# Altium PCB main_board.PcbDoc (part 1 of 3)
Units mil, origin at the board's own origin, x right, y up, seen from the top; angles counter-clockwise.
Board outline 11417.32 x 7421.26 mil, 2 copper layers (Top Layer, Bottom Layer); 177 components, 88 nets, 592 pads, 139 vias.
Unrouted connection lines stored in the file: 154.
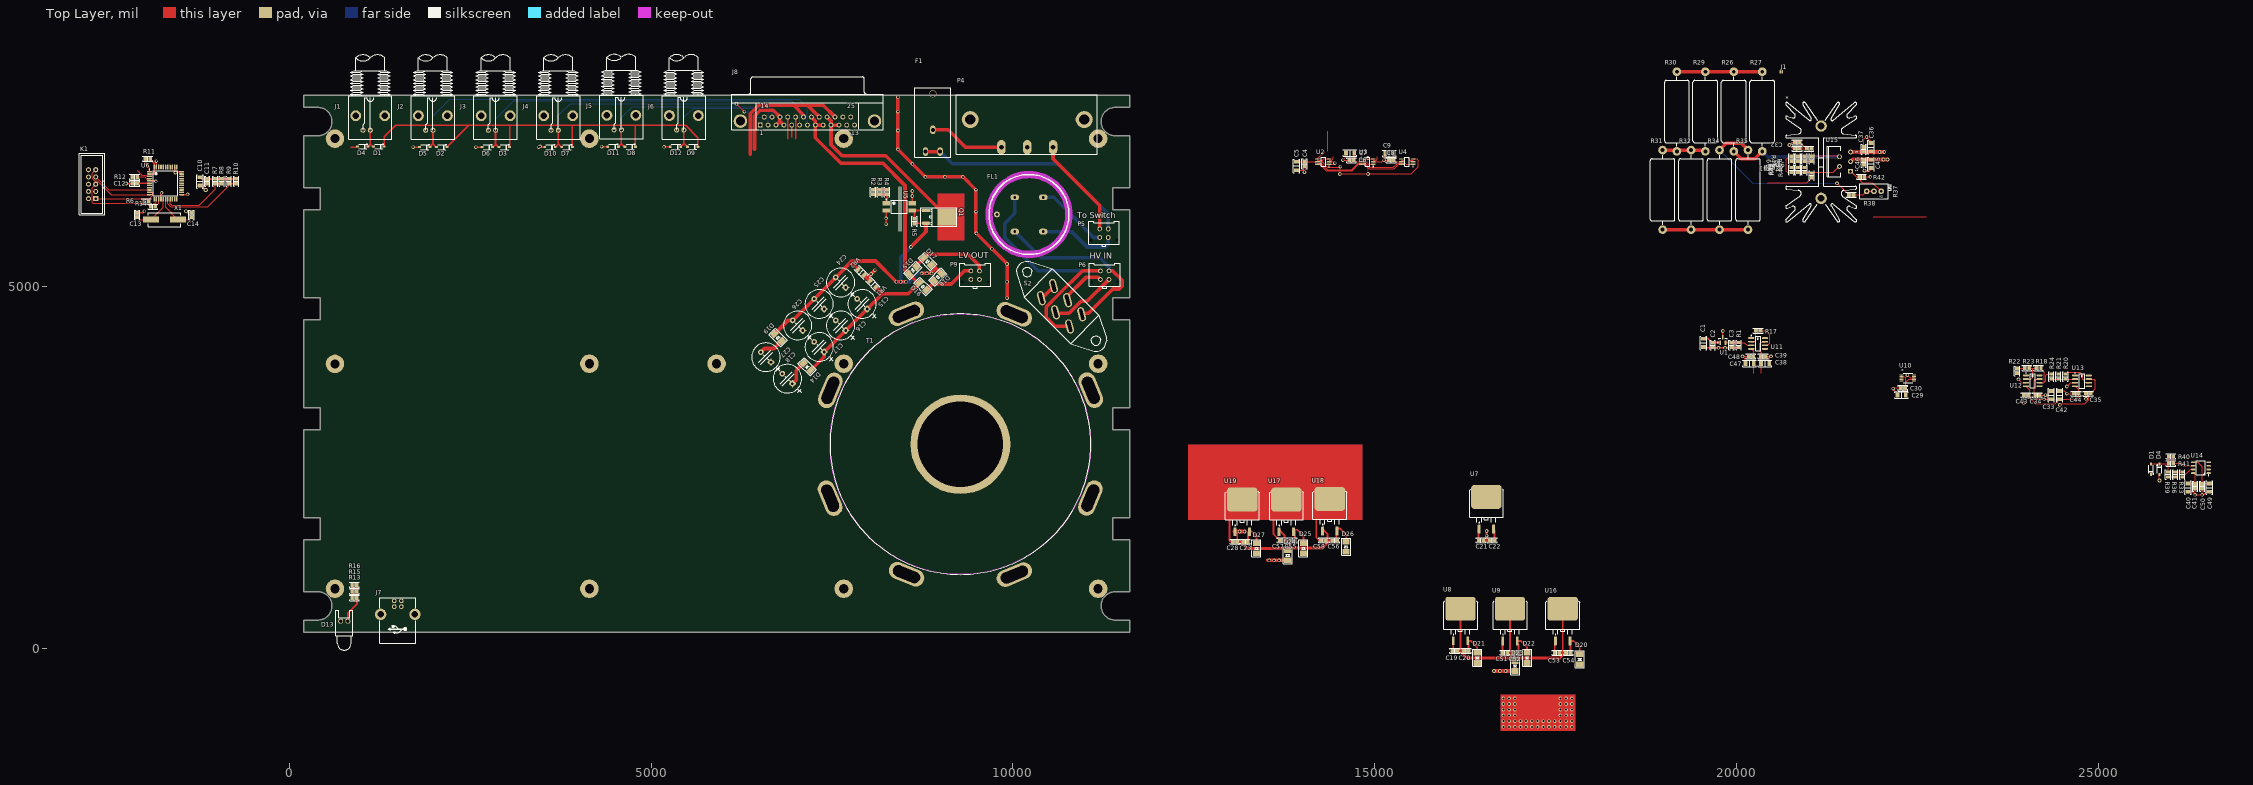
[diagram p0: Top Layer view]
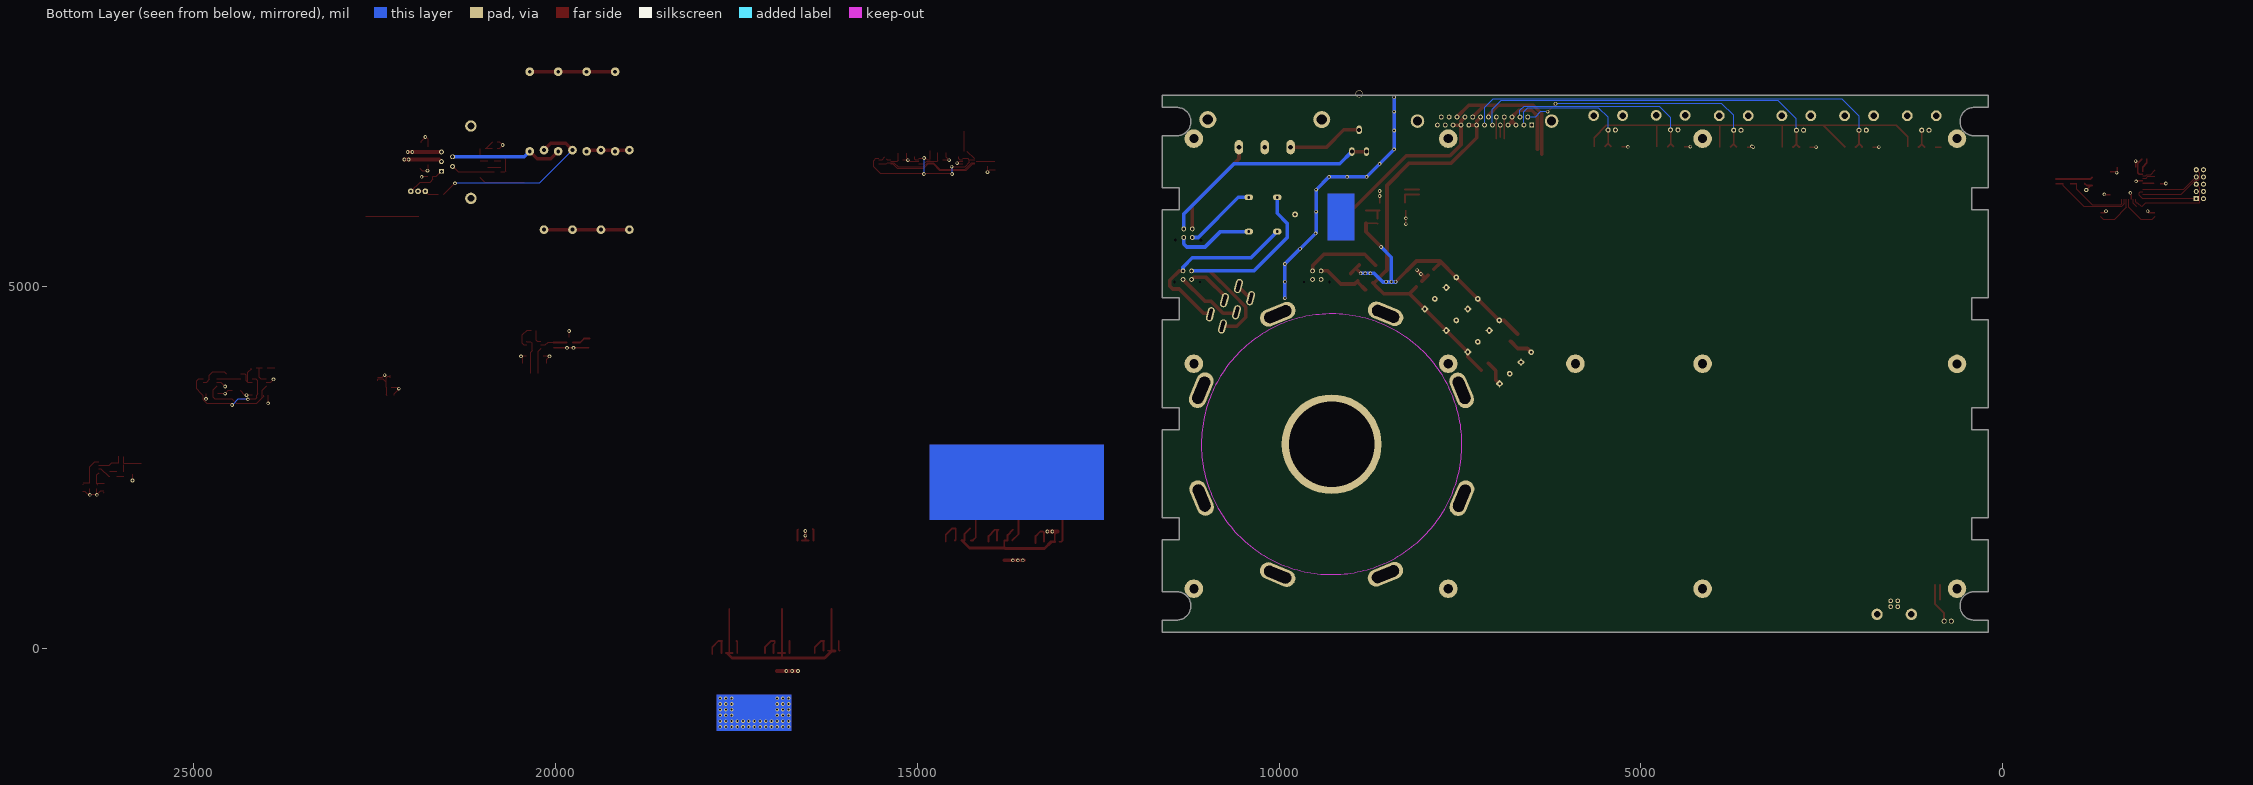
[diagram p1: Bottom Layer view, seen from below]

## Layer stack, top to bottom
Top Solder: solder mask 0.4, Solder Resist, Dk 3.5
Top Layer: signal copper 1.4
Dielectric 1: dielectric 12.6, FR-4, Dk 4.8
Bottom Layer: signal copper 1.4
Bottom Solder: solder mask 0.4, Solder Resist, Dk 3.5

## Board outline
196.85,787.4 196.85,1505.48 429.99,1505.48 429.99,1809.49 196.85,1809.49 196.85,3025.16 429.99,3025.16 429.99,3329.17 196.85,3329.17 196.85,4544.85 429.99,4544.85 429.99,4848.86 196.85,4848.86 196.85,6064.53 429.99,6064.53 429.99,6368.54 196.85,6368.54 196.85,7086.61 393.7,7086.61 ccw(c393.7,7283.46) 393.7,7480.31 196.85,7480.31 196.85,7647.64 11614.17,7647.64 11614.17,7480.31 11417.32,7480.31 ccw(c11417.32,7283.46) 11417.32,7086.61 11614.17,7086.61 11614.17,6368.54 11381.03,6368.54 11381.03,6064.53 11614.17,6064.53 11614.17,4848.86 11381.03,4848.86 11381.03,4544.85 11614.17,4544.85 11614.17,3329.17 11381.03,3329.17 11381.03,3025.16 11614.17,3025.16 11614.17,1809.49 11381.03,1809.49 11381.03,1505.48 11614.17,1505.48 11614.17,787.4 11417.32,787.4 ccw(c11417.32,590.55) 11417.32,393.7 11614.17,393.7 11614.17,226.38 196.85,226.38 196.85,393.7 393.7,393.7 ccw(c393.7,590.55) 393.7,787.4

## Design rules (kind name [scope] priority, off if disabled: settings)
Clearance [All] p1: gap=6 ignorepadtopadclearanceinfootprint=FALSE except(0: Arc-Hole Track-Hole SMDPad-Hole THPad-Hole Via-Hole Fill-Hole Poly-Hole Region-Hole Text-Hole)
DiffPairsRouting [All] p1: maxlimit=10 minlimit=10 mostfreqgap=10 toplayer_minwidth=15 toplayer_maxwidth=15 toplayer_prefwidth=15 bottomlayer_minwidth=15 bottomlayer_maxwidth=15 bottomlayer_prefwidth=15 maxuncoupledlength=500
FanoutControl Fanout_LCC [All] p1 off: bgadir=Out bgaviamode=Centered fanoutstyle=Auto fanoutdirection=Alternating viagrid=1 // Protel DXP Scope 1 Expression Was: IsLCC   Fanout_LCC (Default Rule)
FanoutControl Fanout_BGA [All] p2 off: bgadir=Out bgaviamode=Centered fanoutstyle=Auto fanoutdirection=Alternating viagrid=1 // Protel DXP Scope 1 Expression Was: IsBGA   Fanout_BGA (Default Rule)
FanoutControl Fanout_SOIC [All] p3 off: bgadir=Out bgaviamode=Centered fanoutstyle=Auto fanoutdirection=Alternating viagrid=1 // Protel DXP Scope 1 Expression Was: IsSOIC   Fanout_SOIC (Default Rule)
FanoutControl Fanout_Default [All] p4: bgadir=Out bgaviamode=Centered fanoutstyle=Auto fanoutdirection=Alternating viagrid=1 // Fanout_Default (Default Rule)
FanoutControl Fanout_Small [All] p5 off: bgadir=Out bgaviamode=Centered fanoutstyle=Auto fanoutdirection=Alternating viagrid=1 // Protel DXP Scope 1 Expression Was: (CompPinCount < 5)   Fanout_Small (Default Rule)
Height [All] p1: minheight=0 maxheight=2755.91 prefheight=500
PolygonConnect [All] p1: connectstyle=Relief reliefconductorwidth=10 reliefentries=4 polygonreliefangle="90 Angle" airgapwidth=10
RoomDefinition mcu [InComponentClass('mcu')] p1: confinementstyle=ConfineIn formatcopy=TRUE lockcomponents=FALSE outline -18820.26,-10826.6 -16820.26,-10826.6 -16820.26,-9826.6 -18820.26,-9826.6
RoomDefinition cc_gen_and_heat_pwr [InComponentClass('cc_gen_and_heat_pwr')] p2: confinementstyle=ConfineIn formatcopy=TRUE lockcomponents=FALSE outline -18820.26,-10826.6 -16820.26,-10826.6 -16820.26,-9826.6 -18820.26,-9826.6
RoomDefinition bncs [InComponentClass('bncs')] p3: confinementstyle=ConfineIn formatcopy=TRUE lockcomponents=FALSE outline -18820.26,-10826.6 -16820.26,-10826.6 -16820.26,-9826.6 -18820.26,-9826.6
RoomDefinition power_supply [InComponentClass('power_supply')] p4: confinementstyle=ConfineIn formatcopy=TRUE lockcomponents=FALSE outline -18820.26,-10826.6 -16820.26,-10826.6 -16820.26,-9826.6 -18820.26,-9826.6
RoutingVias [All] p1: holewidth=28 width=50 viastyle="Through Hole" minholewidth=28 minwidth=50 maxholewidth=28 maxwidth=50
SilkToSolderMaskClearance [All] p1 off: minsilkscreentomaskgap=10 clearancetoexposedcopper=TRUE // Protel DXP Scope 1 Expression Was: IsPad
SolderMaskExpansion [All] p1: expansion=4
Width [All] p1: maxlimit=50 minlimit=6 preferedwidth=25
22 further rules are at their usual default settings.

## Classes and differential pairs
component class power_supply: C15 C16 C17 C18 C19 C20 C21 C22 C23 C24 C25 C26 C27 C28 C51 C52 C53 C54 C55 C56 C57 C58 D14 D15 D16 D17 D18 D19 D20 D21 D22 D23 D24 D25 D26 D27 F1 FL1 P3 P4 P5 P6 P7 P8 P9 S1 S2 T1 U7 U8 U9 U16 U17 U18 U19 VR1 VR2
component class mcu: C4 C5 C6 C7 C8 C9 C10 C11 C12 C13 C14 D13 J7 J8 K1 Q1 R2 R3 R4 R5 R6 R7 R8 R9 R10 R11 R12 R13 R14 R15 R16 U2 U3 U4 U5 U6 X1
component class bncs: D1 D2 D3 D4 D5 D6 D7 D8 D9 D10 D11 D12 J1 J2 J3 J4 J5 J6
component class cc_gen_and_heat_pwr: * C1 C2 C3 C29 C30 C31 C32 C33 C34 C35 C36 C37 C38 C39 C40 C41 C42 C43 C44 C45 C46 C47 C48 C49 C50 D1 D4 J1 R1 R6 R17 R18 R19 R20 R21 R22 R23 R24 R25 R26 R27 R28 R29 R30 R31 R32 R33 R34 R35 R36 R37 R38 R39 R40 R41 R42 R43 R44 R45 R46 R47 R48 R? U1 U10 U11 U12 U13 U14 U15
differential pair D: +D_P -D_N
differential pair XTAL: +XTAL_P -XTAL_N
differential pair USBD: +USBD_P -USBD_N

## Components (designator, comment, footprint, x,y, rotation, side; value= is the part's Value field where it differs from the comment)
* "SK129-63STS" SK129-63STS 21170,6720 r90 top
C1 "" "CAP 1206/3216" 19542.19,4224.94 r270 top
C2 "" "CAP 0805/2012" 19672.19,4194.94 r270 top
C3 "" "CAP 0805/2012" 19932.19,4194.94 r270 top
C4 "" "CAP 0805/2012" 14030,6700 r270 top
C5 "" "CAP 1206/3216" 13920,6670 r270 top
C6 "" "CAP 0805/2012" 14680,6750 r180 top
C7 "" "CAP 1206/3216" 14660,6850 r180 top
C8 "" "CAP 0805/2012" 15230,6750 r180 top
C9 "" "CAP 1206/3216" 15205,6845 r180 top
C10 "" "CAP 1206/3216" -1234.71,6457.85 r270 top
C11 "" "CAP 0805/2012" -1134.71,6457.85 r270 top
C12 "" "CAP 0805/2012" -2134.71,6427.85 r0 top
C13 "" "CAP 0805/2012" -2101.52,5994.58 r90 top
C14 "" "CAP 0805/2012" -1351.52,5994.58 r90 top
C15 "" CAPE5.0mm 7916.98,4763.02 r135 top
C16 "" CAPE5.0mm 7620,4466.03 r135 top
C17 "" CAPE5.0mm 7323.02,4169.05 r135 top
C18 "" CAPE5.0mm 6884.61,3730.64 r135 top
C19 "" "CAP 0805/2012" 16105.91,-30.71 r0 top
C20 "" "CAP 0805/2012" 16265.91,-30.71 r180 top
C21 "" "CAP 0805/2012" 16468.5,1496.06 r0 top
C22 "" "CAP 0805/2012" 16625.98,1496.06 r180 top
C23 "" "CAP 0805/2012" 13216.54,1476.38 r0 top
C24 "" CAPE5.0mm 7620,5060 r135 top
C25 "" CAPE5.0mm 7323.02,4763.02 r135 top
C26 "" CAPE5.0mm 7026.03,4466.03 r135 top
C27 "" CAPE5.0mm 6587.62,4027.62 r135 top
C28 "" "CAP 0805/2012" 13070.87,1476.38 r180 top
C29 "Cap2" "CAP 1206/3216" 22283.46,3503.94 r180 top value=10uF
C30 "Cap2" "CAP 0805/2012" 22303.15,3602.36 r180 top value=100nF
C31 "" "CAP 0805/2012" 20840,7000 r180 top
C32 "" "CAP 0805/2012" 20840,6910 r180 top
C33 "Cap2" "CAP 1206/3216" 24350.39,3503.94 r90 top value=10uF
C34 "Cap2" "CAP 0805/2012" 24161.42,3503.94 r0 top value=100nF
C35 "Cap2" "CAP 0805/2012" 24862.2,3523.62 r180 top value=100nF
C36 "Cap2" "CAP 1206/3216" 21860,6930 r90 top value=10uF
C37 "Cap2" "CAP 0805/2012" 21760,6900 r90 top value=100nF
C38 "Cap2" "CAP 1206/3216" 20396.61,3941.26 r0 top value=10uF
C39 "Cap2" "CAP 0805/2012" 20371.02,4039.68 r0 top value=100nF
C40 "Cap2" "CAP 1206/3216" 26240.16,2224.41 r270 top value=10uF
C41 "Cap2" "CAP 0805/2012" 26338.58,2244.09 r270 top value=100nF
C42 "Cap2" "CAP 1206/3216" 24468.5,3503.94 r270 top value=10uF
C43 "Cap2" "CAP 0805/2012" 24003.94,3503.94 r0 top value=100nF
C44 "Cap2" "CAP 0805/2012" 24696.85,3523.62 r0 top value=100nF
C45 "Cap2" "CAP 1206/3216" 21860,6700 r90 top value=10uF
C46 "Cap2" "CAP 0805/2012" 21760,6720 r90 top value=100nF
C47 "Cap2" "CAP 1206/3216" 20182.05,3941.26 r0 top value=10uF
C48 "Cap2" "CAP 0805/2012" 20201.73,4039.68 r0 top value=100nF
C49 "Cap2" "CAP 1206/3216" 26535.43,2224.41 r90 top value=10uF
C50 "Cap2" "CAP 0805/2012" 26437.01,2244.09 r90 top value=100nF
C51 "" "CAP 0805/2012" 16799.21,-59.06 r0 top
C52 "" "CAP 0805/2012" 16956.69,-59.06 r180 top
C53 "" "CAP 0805/2012" 17519.69,-59.06 r0 top
C54 "" "CAP 0805/2012" 17677.17,-59.06 r180 top
C55 "" "CAP 0805/2012" 13866.14,1496.06 r0 top
C56 "" "CAP 0805/2012" 14448.82,1496.06 r0 top
C57 "" "CAP 0805/2012" 13720.47,1496.06 r180 top
C58 "" "CAP 0805/2012" 14291.34,1496.06 r180 top
D1 "" SOD123 1238.27,6938.82 r180 top
D1 "" SOD123 25728.35,2480.31 r90 top
D2 "" SOD123 2106.93,6931.02 r180 top
D3 "" SOD123 2973.07,6931.02 r180 top
D4 "" SOD123 1015.83,6938.82 r180 top
D4 "" SOD123 25846.46,2480.31 r270 top
D5 "" SOD123 1870.71,6931.02 r180 top
D6 "" SOD123 2736.85,6931.02 r180 top
D7 "" SOD123 3839.21,6931.02 r180 top
D8 "" SOD123 4711.26,6936.93 r180 top
D9 "" SOD123 5574.65,6934.17 r180 top
D10 "" SOD123 3602.99,6931.02 r180 top
D11 "" SOD123 4475.04,6936.93 r180 top
D12 "" SOD123 5338.42,6934.17 r180 top
D13 "" LED-0 760,380 r0 top
D14 "" DIODE-SMA 7231.09,3822.56 r315 top
D15 "" DIODE-SMA 8689.33,5300.33 r45 top
D16 "" DIODE-SMA 8830.75,4932.63 r315 top
D17 "" DIODE-SMA 8894.39,5279.12 r315 top
D18 "" DIODE-SMA 9035.81,5208.41 r45 top
D19 "" DIODE-SMA 6828.04,4225.61 r315 top
D20 "" DIODE-SMA 17834.65,-44.29 r90 top
D21 "" DIODE-SMA 16417.32,-24.61 r90 top
D22 "" DIODE-SMA 17106.3,-24.61 r90 top
D23 "" DIODE-SMA 16940,-135.55 r90 top
D24 "" DIODE-SMA 13799.21,1186.02 r270 top
D25 "" DIODE-SMA 14015.75,1282.48 r270 top
D26 "" DIODE-SMA 14606.3,1304.13 r270 top
D27 "" DIODE-SMA 13366.14,1282.48 r270 top
F1 "" FPG5-3101-0050 8675,6800 r0 top
FL1 "" FM412-2 10225,6000 r180 top
J1 "2 way net tie junction" 2way_LP 20620,7970 r180 top net-tie
J1 "" BNC-RA 1319.53,7364.09 r0 top
J2 "" BNC-RA 2185.67,7364.09 r0 top
J3 "" BNC-RA 3051.81,7364.09 r0 top
J4 "" BNC-RA 3917.95,7364.09 r0 top
J5 "" BNC-RA 4790,7370 r0 top
J6 "" BNC-RA 5653.39,7367.24 r0 top
J7 "" USB_TypeB 1500,620 r180 top
J8 "" DB25 6509.21,7234.72 r0 top
K1 "" IDC10-B -2674.71,6217.85 r90 top
P4 "" GSP1-8101-1 9842.52,6929.13 r0 top
P5 "" MOLEX-430450412 11200,5800 r180 top
P6 "" MOLEX-430450412 11210,5220 r180 top
P9 "" MOLEX-430450412 9420,5220 r180 top
Q1 "IRF640" DPAK-GDS 8799.88,6055 r0 top
R1 "" "RES 0805/2012" 20032.19,4194.94 r270 top
R2 "" "RES 0805/2012" 8066.48,6310.55 r90 top
R3 "" "RES 0805/2012" 8159.88,6310.81 r90 top
R4 "" "RES 0805/2012" 8259.88,6310.81 r90 top
R5 "" "RES 0805/2012" 8639.88,5905 r90 top
R6 "" "RES 0805/2012" -1974.45,6180 r180 top
R7 "" "RES 0805/2012" -1024.71,6457.85 r90 top
R8 "" "RES 0805/2012" -934.71,6457.85 r90 top
R9 "" "RES 0805/2012" -834.71,6457.85 r90 top
R10 "" "RES 0805/2012" -734.71,6457.85 r90 top
R11 "" "RES 0805/2012" -1954.71,6767.85 r0 top
R12 "" "RES 0805/2012" -2134.71,6517.85 r180 top
R13 "" "RES 0805/2012" 900,700 r180 top
R14 "Res1" "RES 0805/2012" -1884.71,6107.85 r0 top
R15 "" "RES 0805/2012" 900,790 r180 top
R16 "" "RES 0805/2012" 900,880 r180 top
R17 "" "RES 0805/2012" 20300.16,4394.02 r180 top
R18 "" "RES 0805/2012" 24173.23,3877.95 r180 top
R19 "" "RES 0805/2012" 21040,6770 r270 top
R20 "" "RES 0805/2012" 24547.24,3759.84 r270 top
R21 "" "RES 0805/2012" 24448.82,3759.84 r90 top
R22 "" "RES 0805/2012" 23877.95,3838.58 r270 top
R23 "" "RES 0805/2012" 24015.75,3877.95 r180 top
R24 "" "RES 0805/2012" 24350.39,3759.84 r90 top
R25 "" "RES 0805/2012" 21040,6540 r90 top
R26 "" RESTH_AXIAL_MRA-10 19963.15,7422.68 r270 top
R27 "" RESTH_AXIAL_MRA-10 20356.85,7422.68 r270 top
R28 "" "RES 0805/2012" 21004.45,6910 r0 top
R29 "" RESTH_AXIAL_MRA-10 19569.45,7422.68 r90 top
R30 "" RESTH_AXIAL_MRA-10 19175.75,7422.68 r90 top
R31 "" RESTH_AXIAL_MRA-10 18978.9,6340 r90 top
R32 "" RESTH_AXIAL_MRA-10 19372.6,6340 r90 top
R33 "" "RES 0805/2012" 26161.42,2406.5 r270 top
R34 "" RESTH_AXIAL_MRA-10 19766.3,6340 r270 top
R35 "" RESTH_AXIAL_MRA-10 20160,6340 r270 top
R36 "" "RES 0805/2012" 26062.99,2406.5 r90 top
R37 "Multiturn" trimmer-multiturn 22000,6320 r180 top
R38 "" "RES 0805/2012" 21585.55,6270 r0 top
R39 "" "RES 0805/2012" 25964.57,2406.5 r270 top
R40 "" "RES 0805/2012" 26003.94,2657.48 r0 top
R41 "" "RES 0805/2012" 26003.94,2559.06 r0 top
R42 "" "RES 0805/2012" 21730,6520 r0 top
R43 "" "RES 0805/2012" 20940,6614.45 r270 top
R44 "" "RES 0805/2012" 20850,6614.45 r270 top
R45 "" "RES 0805/2012" 20760,6614.45 r270 top
R46 "" "RES 0805/2012" 20760,6770 r90 top
R47 "" "RES 0805/2012" 20850,6770 r90 top
R48 "" "RES 0805/2012" 20940,6770 r90 top
S2 "" T22205B 10393.7,4842.52 r315 top
T1 "toroidal_transformer" MCTA060 9275,2825 r22.5 top
U1 "" TI-DBZ3_N 19812.19,4264.94 r90 top
U2 "" TI-DGS10_N 14290,6730 r180 top
U3 "" TI-DGS10_N 14900,6730 r180 top
U4 "" TI-DGS10_N 15450,6730 r180 top
U5 "LTV-817" gullwing-opto-4 8429.88,6105 r0 top
U6 "" 44ML_N -1709.71,6432.85 r0 top
U7 "" D2PAK-3 16544.21,1874.72 r270 top
U8 "" D2PAK-3 16185.91,329.29 r270 top
U9 "" D2PAK-3 16870.08,328.68 r270 top
U10 "" 21-0061L 22368.96,3740.16 r0 top value=Value
U11 "" TI-D8_N 20300.16,4216.85 r0 top
U12 "" TI-D8_N 24094.49,3700.79 r0 top
U13 "" TI-D8_N 24775,3700 r0 top
U14 "" SOIC8-AD8220 26524.8,2426.18 r0 top
U15 "" TO-220-5 21500.08,6730.08 r90 top
U16 "" D2PAK-3 17598.43,328.68 r270 top
U17 "" D2PAK-3 13780,1837.5 r270 top
U18 "" D2PAK-3 14380,1847.5 r270 top
U19 "" D2PAK-3 13170,1837.5 r270 top
VR1 "" "CAP 1206/3216 - 1.8MM" 8065.48,5038.79 r135 top
VR2 "" "CAP 1206/3216 - 1.8MM" 7902.84,5201.42 r135 top
X1 "" "ABRACON ABLS" -1724.71,5927.85 r0 top

## Footprints (in the part's own frame and the unit in brackets; to place one, negate y for a bottom-side part, rotate by r counter-clockwise, add the part's x,y. Pads: shape width x height; smd on the part's side, far side on the other; paste and mask are expansions set on the pad)
2way_LP [mil] "2 way low power net tie junction"
  rrect5% 20x50 smd paste-100: 1(-14,0) 2(14,0)
21-0061L [mil]
  rect 56x11 smd: 1(-85.5,39.37) 2(-85.5,19.68) 3(-85.5,0) 4(-85.5,-19.68) 5(-85.5,-39.37) 6(85.5,-39.37) 7(85.5,-19.68) 8(85.5,0) 9(85.5,19.68) 10(85.5,39.37)
  silkscreen extent -65,-65 65,65
44ML_N [mm] "Thin QFP, 44-Leads, Body 10x10mm, Pitch 0.8mm, IPC Medium Density"
  oval 1.75x0.55 smd: 1(-5.65,4) 2(-5.65,3.2) 3(-5.65,2.4) 4(-5.65,1.6) 5(-5.65,0.8) 6(-5.65,0) 7(-5.65,-0.8) 8(-5.65,-1.6) 9(-5.65,-2.4) 10(-5.65,-3.2) 11(-5.65,-4) 23(5.65,-4) 24(5.65,-3.2) 25(5.65,-2.4) 26(5.65,-1.6) 27(5.65,-0.8) 28(5.65,0) 29(5.65,0.8) 30(5.65,1.6) 31(5.65,2.4) 32(5.65,3.2) 33(5.65,4)
  oval 0.55x1.75 smd: 12(-4,-5.65) 13(-3.2,-5.65) 14(-2.4,-5.65) 15(-1.6,-5.65) 16(-0.8,-5.65) 17(0,-5.65) 18(0.8,-5.65) 19(1.6,-5.65) 20(2.4,-5.65) 21(3.2,-5.65) 22(4,-5.65) 34(4,5.65) 35(3.2,5.65) 36(2.4,5.65) 37(1.6,5.65) 38(0.8,5.65) 39(0,5.65) 40(-0.8,5.65) 41(-1.6,5.65) 42(-2.4,5.65) 43(-3.2,5.65) 44(-4,5.65)
  silkscreen extent -5.77,-4.35 4.35,4.95, body extent -5,-5 5,5, height 1.2
"ABRACON ABLS" [mm] "Crystal, 2-Leads, Body 4.70x11.40mm, Pitch 8.80mm, IPC Medium Density"
  rect 5.6x2.1 smd: 1(-4.75,0) 2(4.75,0)
  silkscreen extent -5.78,-2.43 5.77,2.43, body extent -6.35,-2.35 6.35,2.35, height 4.2
BNC-RA [mil]
  round 70 hole 40: 1(-200,-200) 2(-300,-200)
  round 150 hole 90: A(0,0) B(-400,0)
  silkscreen extent -500,-325 100,842, body extent -490,-280 91,1127, height 619
"CAP 0805/2012" [mm] "Chip Capacitor, 2-Leads, Body 2.00x1.20mm, IPC Medium Density"
  rect 1.3x1.4 smd: 1(-0.8,0) 2(0.8,0)
  silkscreen extent -1.7,-0.9 1.7,0.9, body extent -1,-0.64 1,0.64, height 1.26
"CAP 1206/3216" [mm] "Chip Capacitor, 2-Leads, Body 3.25x1.60mm, IPC Medium Density"
  rect 1.3x1.8 smd: 1(-1.45,0) 2(1.45,0)
  silkscreen extent -2.37,-1.12 2.38,1.12, body extent -1.6,-0.81 1.6,0.81, height 1.62
"CAP 1206/3216 - 1.8MM" [mm] "Chip Capacitor, 2-Leads, Body 3.25x1.60mm, IPC Medium Density"
  rect 1.3x1.8 smd: 1(-1.45,0) 2(1.45,0)
  silkscreen extent -2.38,-1.13 2.38,1.13, body extent -1.6,-0.8 1.6,0.8, height 1.8
CAPE5.0mm [mm]
  rrect25% 2x2 hole 0.9: 1(-2.5,0)
  round 2 hole 0.9: 2(2.5,0)
  silkscreen extent -6.8,-5 5,5, body extent -4.96,-4.97 4.95,4.96, height 20
D2PAK-3 [mil] "D-PAK/TO-263-3; 3 Leads (1 Cropped); Body 14.7 (inc. leads) x 10.2 mm (LxW max)"
  round 20 on Mech15: 0(0,0)
  rrect25% 120x40 smd: 1(222.5,-100) 3(222.5,100)
  rrect25% 330x420 smd: 2(-222.5,0)
  silkscreen extent -335,-232 139,236, body extent -361,-197 256,197, height 189
DB25 [mm]
  rect 1.69x1.69 hole 1.09: 1(0,0)
  round 1.69 hole 1.09: 2(2.761,0) 3(5.522,0) 4(8.283,0) 5(11.044,0) 6(13.805,0) 7(16.566,0) 8(19.327,0) 9(22.088,0) 10(24.849,0) 11(27.61,0) 12(30.371,0) 13(33.132,0) 14(1.381,2.84) 15(4.142,2.84) 16(6.903,2.84) 17(9.664,2.84) 18(12.424,2.84) 19(15.185,2.84) 20(17.946,2.84) 21(20.707,2.84) 22(23.469,2.84) 23(26.23,2.84) 24(28.991,2.84) 25(31.752,2.84)
  round 4.76 hole 3.26: 26(-6.96,1.42) 27(40.092,1.42)
  silkscreen extent -9.93,-1.58 43.17,16.92, body extent -9.95,-1.55 43.15,16.95, height 12.6
DIODE-SMA [mm]
  rect 2x2.5 smd: A(-0.875,0) K(-4.425,0)
  silkscreen extent -5.65,-1.58 0.35,1.55, body extent -5.2,-1.3 0,1.3, height 2.4
DPAK-GDS [mm]
  rect 6.5x5.9 smd: D(7.275,-2.25)
  oval 3x1.2 smd: G(0,0) S(0,-4.5)
  silkscreen extent -1.78,-5.46 10.79,1.02, body extent -0.5,-5.48 9.44,1.06, height 2.41
FM412-2 [mil]
  oval 120x80 hole 39.37: 1(-195,-236.5) 2(199,-236.5) 4(199,236.5) 5(-194,236.5)
  round 80 hole 39.37: 3(445,-0.5)
  Top Layer keep-out circle w100: c2.43,-0.07 r551.18
  silkscreen extent -551,-552 554,553, body extent -549,-549 553,554, height 610
FPG5-3101-0050 [mm]
  oval 1.905x3.048 hole 1.397: 1(5.55,9.375) 2(3,1.75) 2(8.1,1.75)
  round 2.54 hole 2.159: 4(5.55,22.075)
  silkscreen extent -0.78,-0.18 11.85,24.15, body extent -0.68,0.02 11.82,32.02, height 12.75
GSP1-8101-1 [mm]
  oval 3x5 hole 1.65: 1(0,0) 2(9.05,0) 3(18.1,0)
  round 6 hole 3.6: NC(-10.95,9.7) NC(29.05,9.7)
  silkscreen extent -15.88,-2.54 33.66,18.41, body extent -15.79,-2.48 33.81,21.82, height 30.25
gullwing-opto-4 [mm] "SOP, 4-Leads, Body 4,60x6,50mm, Pitch 2,54mm, IPC Low Density"
  rect 2.6x1.45 smd: 1(-4.575,1.27) 2(-4.575,-1.27) 3(4.575,-1.27) 4(4.575,1.27)
  silkscreen extent -4.7,-2.3 2.88,2.67, body extent -5.15,-2.3 5.15,2.3, height 3.5
IDC10-B [mil]
  rect 70x70 hole 40: 1(0,0)
  round 70 hole 40: 2(0,100) 3(100,0) 4(100,100) 5(200,0) 6(200,100) 7(300,0) 8(300,100) 9(400,0) 10(400,100)
  silkscreen extent -225,-125 625,225, body extent -225,-125 625,225, height 358
LED-0 [mil] "LED; 2 Leads"
  round 70 hole 50: 1(50,0) 2(-50,0)
  silkscreen extent -120,-400 120,150
MCTA060 [mm]
  oval 6x13 hole 4 slot 10 at 90 deg: NC(-49.53,0) NC(49.53,0)
  oval 13x6 hole 4 slot 10 at 45 deg rot 45: NC(-34.925,34.925) NC(34.925,-34.925)
  oval 13x6 hole 4 slot 10 at 135 deg rot 135: NC(-34.925,-34.925) NC(34.925,34.925)
  oval 13x6 hole 4 slot 10 at 0 deg: NC(0,49.53) NC(0,-49.53)
  round 35 hole 30: NC(0,0)
  Keep-Out Layer region: 0,-45.72 -17.503,-42.244 -32.344,-32.335 -42.263,-17.501 -45.75,0 -45.75,0 -39.621,22.875 -22.875,39.62 0,45.75 0,45.75 17.501,42.263 32.335,32.344 42.244,17.503 45.72,0 45.72,0 42.24,-17.496 32.329,-32.329 17.496,-42.24 0,-45.72
  silkscreen extent -45.75,-45.75 45.75,45.75, body extent -45.75,-45.74 45.75,45.74, height 39.13
MOLEX-430450412 [mil]
  round 65 hole 39.37: 1(0,0) 2(-118,0) 3(0,118) 4(-118,118)
  round 0 hole 39.37 unplated: NC(-236,155)
  round 0 hole 42.91 unplated: NC(118,156)
  silkscreen extent -273,-108 154,240, body extent -259,-97 141,248, height 393
"RES 0805/2012" [mm] "Chip Resistor, 2-Leads, Body 2.00x1.25mm, IPC Medium Density"
  rect 1.15x1.35 smd: 1(-0.875,0) 2(0.875,0)
  silkscreen extent -1.7,-0.9 1.7,0.9, body extent -0.95,-0.62 1.05,0.63, height 0.6
RESTH_AXIAL_MRA-10 [mil] "MRA-10 Axial Resistor Thru-Hole; 2 Leads"
  round 50 on Mech15: 0(0,0)
  round 120 hole 54: 1(-550,0) 2(550,0)
  silkscreen extent -480,-170 480,170, body extent -567,-171 567,171, height 342
SK129-63STS [mm]
  round 4 hole 2.4: 1(-12.624,-0.013) 1(12.776,-0.013)
  silkscreen extent -20.93,-12.5 21.07,12.5, body extent -20.93,-12.43 21.07,12.57, height 63.7
SOD123 [mm] "SOD-123; 2 Leads; Body 2.7 x 1.6 mm, (LxW)"
  round 0.508 on Mech15: 0(0,0)
  rrect25% 1x0.8 smd: A(1.85,0) K(-1.85,0)
  silkscreen extent -1.75,-1 1.45,0.85, body extent -1.95,-0.9 1.95,0.9, height 1.18
SOIC8-AD8220 [mm]
  round 1 on Mech15: 0(-2.7,1.905)
  oval 1.6x0.6 smd: 1(0,0) 2(0,1.27) 3(0,2.54) 4(0,3.81) 5(-5.4,3.81) 6(-5.4,2.54) 7(-5.4,1.27) 8(-5.4,0)
  silkscreen extent -4.3,-0.92 0.12,4.4, body extent -5.7,-0.55 0.3,4.36, height 1.75
T22205B [mil]
  oval 200x98.43 hole 45 slot 157.48 at 150 deg rot 150: 1(551.44,237) 2(551.44,0) 3(276,237.39) 4(275.61,0) 5(0,237.39) 6(0,0)
  silkscreen extent -543,-157 1094,394, body extent -542,-157 1092,395, height 517
TI-D8_N [mm] "SOIC, 8-Leads, Body 4.9x3.9mm, Pitch 1.27mm, IPC Medium Density"
  oval 2.2x0.6 smd: 1(-2.4,1.905) 2(-2.4,0.635) 3(-2.4,-0.635) 4(-2.4,-1.905) 5(2.4,-1.905) 6(2.4,-0.635) 7(2.4,0.635) 8(2.4,1.905)
  silkscreen extent -2.52,-2.5 0.9,2.88, body extent -2,-2.5 2,2.5, height 1.75
TI-DBZ3_N [mm] "SOT23, 3-Leads, Body 2.92x1.3 mm, Pitch 0.95 mm, IPC Medium Density"
  rect 1.6x0.6 smd: 1(-0.9,0.95) 2(-0.9,-0.95) 3(0.9,0)
  silkscreen extent -1.02,-1.5 0.7,1.92, body extent -0.7,-1.52 0.7,1.52, height 1.12
TI-DGS10_N [mm] "SOP, 10-Leads, Body 3x3mm, Pitch 0.5mm, IPC Medium Density"
  oval 1.7x0.3 smd: 1(-2.05,1) 2(-2.05,0.5) 3(-2.05,0) 4(-2.05,-0.5) 5(-2.05,-1) 6(2.05,-1) 7(2.05,-0.5) 8(2.05,0) 9(2.05,0.5) 10(2.05,1)
  silkscreen extent -2.18,-1.55 0.8,1.82, body extent -1.55,-1.55 1.55,1.55, height 1.1
TO-220-5 [mm] "TO, Thru-Hole, Vertical, Heatsink Mounted; 5 Bent Staggered Leads; Pitch 1.7mm"
  round 0.5 on Mech15: 0(0,0)
  rrect25% 1.7x1.7 hole 1.092: 1(-3.4,-1.96)
  round 1.7 hole 1.092: 2(-1.7,1.96) 3(0,-1.96) 4(1.7,1.96) 5(3.4,-1.96)
  silkscreen extent -5.35,1.51 5.35,6.21, body extent -5.08,-2.16 5.08,6.08, height 20.99
trimmer-multiturn [mil]
  round 80 hole 38: 1(0,0) 2(200,0) 3(100,0)
  silkscreen extent -140,-104 295,104, body extent -140,-98 289,98, height 394
USB_TypeB [mil]
  round 64 hole 36 mask+1: 1(-49.21,-39.16) 2(49.21,-39.16) 3(49.21,39.58) 4(-49.21,39.58)
  round 157.48 hole 90.55 mask+0: 4(-237.01,146.28) 4(237.01,146.28)
  silkscreen extent -250,-85 250,545, body extent -283,-67 283,551, height 453

## Part data
C1 C5 C7 C9 C10: library part Cap2, "Capacitor", Capacitance=10µF, Capacitor kind=MLCC, Capacitor type=ceramic, Case - inch=1206, Case - mm=3216, Dielectric=X5R, Manufacturer=SAMSUNG, Manufacturer Part Number=CL31A106KAHNNNE, Operating temperature=-55...85°C, Operating voltage=25V, Tolerance=±10%, Category="1206 MLCC SMD Capacitors", ComponentLink1Description=http://static.tme.eu/products_pics/b/e/9/be9e0dd298dcf4979ea1dd3d226e0bfa/58780.jpg, ComponentLink1URL=http://static.tme.eu/products_pics/b/e/9/be9e0dd298dcf4979ea1dd3d226e0bfa/58780.jpg, MinAmount=100, Mounting=SMD, Multiples=100, PackageDescription=1206, PackageReference=CAPR5-4X5, Price Type=NET, Pricing 1="100=0.0248, 300=0.0203, 1000=0.0167, 2000=0.0131, 10000=0.0127 (EUR)", Published=23-Sep-2002, Publisher="Altium Limited", Stock 1=279700, SuppliedAmount=0, Supplier 1=TME, Supplier Part Number 1=CL31A106KAHNNNE, Unit=pcs, Weight=0.061
C2 C12 C19 C20 C21 C22 C23 C28 C51 C52 C53 C54 C55 C56 C57 C58: library part Cap2, "Capacitor", Capacitance=1µF, Capacitor kind=MLCC, Capacitor type=ceramic, Case - inch=0805, Case - mm=2012, Dielectric=X7R, Manufacturer=SAMSUNG, Manufacturer Part Number=CL21B105KAFNNNE, Operating temperature=-55...125°C, Operating voltage=25V, Tolerance=±10%, Category="0805 MLCC SMD Capacitors", ComponentLink1Description=http://static.tme.eu/products_pics/d/b/b/dbbd93eaf25225110ca26eb66da77328/58538.jpg, ComponentLink1URL=http://static.tme.eu/products_pics/d/b/b/dbbd93eaf25225110ca26eb66da77328/58538.jpg, MinAmount=100, Mounting=SMD, Multiples=100, PackageDescription="Capacitor; 2 Leads", PackageReference=CAPR5-4X5, Price Type=NET, Pricing 1="100=0.0108, 300=0.00924, 1000=0.00748, 2000=0.006, 6000=0.0058 (EUR)", Published=23-Sep-2002, Publisher="Altium Limited", Stock 1=56790, SuppliedAmount=0, Supplier 1=TME, Supplier Part Number 1=CL21B105KAFNNNE, Unit=pcs, Weight=0.039
C3 C4 C6 C8 C11 C31 C32: library part Cap2, "Capacitor", Capacitance=100nF, Capacitor kind=MLCC, Capacitor type=ceramic, Case - inch=0805, Case - mm=2012, Dielectric=X7R, Manufacturer=YAGEO, Manufacturer Part Number=CC0805JRX7R9BB104, Operating voltage=50V, Supplier Part Number 1=CC0805JRX7R9104, Tolerance=±5%, Category="0805 MLCC SMD Capacitors", ComponentLink1Description=http://static.tme.eu/products_pics/d/b/b/dbbd93eaf25225110ca26eb66da77328/58538.jpg, ComponentLink1URL=http://static.tme.eu/products_pics/d/b/b/dbbd93eaf25225110ca26eb66da77328/58538.jpg, MinAmount=100, Mounting=SMD, Multiples=100, Price Type=NET, Pricing 1="100=0.00613, 300=0.00464, 1000=0.00342, 4000=0.00284, 20000=0.00273 (EUR)", Stock 1=89911, SuppliedAmount=0, Supplier 1=TME, Unit=pcs, Weight=0.042
C13 C14: library part Cap2, "Capacitor", Capacitance=22pF, Capacitor kind=MLCC, Capacitor type=ceramic, Case - inch=0805, Case - mm=2012, Dielectric=C0G, Manufacturer=SAMSUNG, Manufacturer Part Number=CL21C220JBANNNC, Operating temperature=-55...125°C, Operating voltage=50V, Tolerance=±5%, Category="0805 MLCC SMD Capacitors", ComponentLink1Description=http://static.tme.eu/products_pics/d/b/b/dbbd93eaf25225110ca26eb66da77328/58538.jpg, ComponentLink1URL=http://static.tme.eu/products_pics/d/b/b/dbbd93eaf25225110ca26eb66da77328/58538.jpg, MinAmount=100, Mounting=SMD, Multiples=100, PackageDescription="Capacitor; 2 Leads", PackageReference=CAPR5-4X5, Price Type=NET, Pricing 1="100=0.00603, 300=0.00435, 1000=0.00317, 4000=0.00171, 12000=0.00163 (EUR)", Published=23-Sep-2002, Publisher="Altium Limited", Stock 1=298580, SuppliedAmount=0, Supplier 1=TME, Supplier Part Number 1=CL21C220JBANNNC, Unit=pcs, Weight=0.032
C15 C16 C17 C18 C24 C25 C26 C27: library part "Cap Pol1", "capacitor , electrolytic", Capacitance=1000µF, Capacitor type=electrolytic, Manufacturer=NICHICON, Manufacturer Part Number=UVZ1V102MHD, Operating current max.=810mA, Operating temperature=-55...105°C, Operating voltage="35V DC", Tolerance=±20%, Body dimensions="Ø12.5 x 20mm", Category="105°C THT Electrolytic Capacitors", ComponentLink1Description=http://static.tme.eu/products_pics/c/5/f/c5fef3dcb868d5f42dbf93bcba194bc3/52948.jpg, ComponentLink1URL=http://static.tme.eu/products_pics/c/5/f/c5fef3dcb868d5f42dbf93bcba194bc3/52948.jpg, ComponentLink2Description=http://static.tme.eu/products_pics/9/d/3/9d3c8a28bff4572cbe0221dcc6b489cc/52582.jpg, ComponentLink2URL=http://static.tme.eu/products_pics/9/d/3/9d3c8a28bff4572cbe0221dcc6b489cc/52582.jpg, LatestRevisionDate=17-Jul-2002, LatestRevisionNote="Re-released for DXP Platform.", MinAmount=5, Mounting=THT, Multiples=1, PackageDescription=10pitch, PackageReference=RB7.6-15, Price Type=NET, Pricing 1="5=0.33643, 25=0.28487, 100=0.21269, 400=0.19593 (EUR)", Pricing 2="25=0.24372, 100=0.18546, 400=0.1709, 1600=0.15536 (EUR)", Published=8-Jun-2000, Publisher="Altium Limited", Service life=1000h, Stock 1=0, Stock 2=838, SuppliedAmount=0, Supplier 1=TME, Supplier 2=TME, Supplier Part Number 1=UVZ1V102MHD, Supplier Part Number 2=UVR1V102MHD, Terminal pitch=5mm, Unit=pcs, Weight=3.7
C29 C33 C36 C38 C40 C42 C45 C47 C49: "Capacitor", Capacitance=10µF, Capacitor kind=MLCC, Capacitor type=ceramic, Case - inch=1206, Case - mm=3216, Dielectric=X5R, Manufacturer=SAMSUNG, Manufacturer Part Number=CL31A106KAHNNNE, Operating temperature=-55...85°C, Operating voltage=25V, Tolerance=±10%, Category="1206 MLCC SMD Capacitors", ComponentLink1Description=http://static.tme.eu/products_pics/b/e/9/be9e0dd298dcf4979ea1dd3d226e0bfa/58780.jpg, ComponentLink1URL=http://static.tme.eu/products_pics/b/e/9/be9e0dd298dcf4979ea1dd3d226e0bfa/58780.jpg, MinAmount=100, Mounting=SMD, Multiples=100, PackageDescription=1206, PackageReference=CAPR5-4X5, Price Type=NET, Pricing 1="100=0.0248, 300=0.0203, 1000=0.0167, 2000=0.0131, 10000=0.0127 (EUR)", Published=23-Sep-2002, Publisher="Altium Limited", Stock 1=279700, SuppliedAmount=0, Supplier 1=TME, Supplier Part Number 1=CL31A106KAHNNNE, Unit=pcs, Weight=0.061
C30 C34 C35 C37 C39 C41 C43 C44 C46 C48 C50: "Capacitor", Capacitance=100nF, Capacitor kind=MLCC, Capacitor type=ceramic, Case - inch=0805, Case - mm=2012, Dielectric=X7R, Manufacturer=SAMSUNG, Manufacturer Part Number=CL21B104KBFNNNG, Operating temperature=-55...125°C, Operating voltage=50V, Tolerance=±10%, Category="0805 MLCC SMD Capacitors", ComponentLink1Description=http://static.tme.eu/products_pics/d/b/b/dbbd93eaf25225110ca26eb66da77328/58538.jpg, ComponentLink1URL=http://static.tme.eu/products_pics/d/b/b/dbbd93eaf25225110ca26eb66da77328/58538.jpg, MinAmount=1000, Mounting=SMD, Multiples=1000, PackageDescription="Capacitor; 2 Leads", PackageReference=CAPR5-4X5, Price Type=NET, Pricing 1="1000=0.00335, 3000=0.00288, 12000=0.0028 (EUR)", Published=23-Sep-2002, Publisher="Altium Limited", Stock 1=0, SuppliedAmount=0, Supplier 1=TME, Supplier Part Number 1=CL21B104KBFNNNG, Unit=pcs, Weight=0.038
D1 D1 D2 D3 D4 D4 D5 D6 D7 D8 D9 D10 D11 D12: library part "D Schottky", "Schottky Diode", Case=SOD123, Forward voltage at If=390mV, Load current=500mA, Manufacturer="FAIRCHILD SEMICONDUCTOR", Manufacturer Part Number=MBR0520L, Off state voltage max.=20V, Category="SMD Schottky Diodes", Code_JEDEC=DO-214-AA, ComponentLink1Description=http://static.tme.eu/products_pics/e/d/b/edbd030cb344fc64745afa0f91101952/285567.jpg, ComponentLink1URL=http://static.tme.eu/products_pics/e/d/b/edbd030cb344fc64745afa0f91101952/285567.jpg, Diode type="Schottky rectifying", LatestRevisionDate=17-Jul-2002, LatestRevisionNote="Re-released for DXP Platform.", MinAmount=10, Mounting=SMD, Multiples=1, PackageDescription="DO-214-AA/SMB; 2 C-Bend Leads; Body 5.3 x 3.6 mm, inc. leads (LxW)", PackageReference=SMB, Price Type=NET, Pricing 1="10=0.0403, 50=0.0376, 250=0.0333, 1000=0.03, 3000=0.0281 (EUR)", Published=8-Jun-2000, Publisher="Altium Limited", Stock 1=24595, SuppliedAmount=0, Supplier 1=TME, Supplier Part Number 1=MBR0520L, Unit=pcs, Weight=0.032
D13: library part LED0, "LED red 5mm", LED colour=red, LED current=20mA, Manufacturer="KINGBRIGHT ELECTRONIC", Manufacturer Part Number=L-1503CB/1ID, Operating voltage=2...2.5V, Category="LED Circuit Board Indicators", ComponentLink1Description=http://static.tme.eu/products_pics/2/d/8/2d8734f7e5dfd4453dcfb445f87d0bf6/363629.jpg, ComponentLink1URL=http://static.tme.eu/products_pics/2/d/8/2d8734f7e5dfd4453dcfb445f87d0bf6/363629.jpg, Diode type=LED, Front=convex, LED diameter=5mm, LED lens=diffused, LED version="in housing", Luminosity=8-30mcd, MinAmount=5, Mounting=THT, Multiples=1, Number of diodes=1, Price Type=NET, Pricing 1="5=0.1308, 10=0.11837, 25=0.10529, 100=0.09483, 500=0.08829 (EUR)", Stock 1=1055, SuppliedAmount=0, Supplier 1=TME, Supplier Part Number 1=L-1503CB/1ID, Unit=pcs, Viewing angle=60°, Wavelength=625nm, Weight=0.4
D14 D15 D16 D17 D18 D19 D20 D21 D22 D23 D24 D25 D26 D27: library part "Diode 1N4007", "Diode rectifier 1A", Case=DO214AC, Load current=1A, Manufacturer=VISHAY, Manufacturer Part Number=S1M-E3/5AT, Off state voltage max.=1kV, Category="SMD Universal Diodes", Code_JEDEC=DO-204-AL, ComponentLink3Description=http://static.tme.eu/products_pics/b/9/c/b9cb4d885950d1fd4db176504dcacd85/60379.jpg, ComponentLink3URL=http://static.tme.eu/products_pics/b/9/c/b9cb4d885950d1fd4db176504dcacd85/60379.jpg, DatasheetVersion=1998, Diode type=rectifying, LatestRevisionDate=17-Jul-2002, LatestRevisionNote="Re-released for DXP Platform.", MinAmount=25, Mounting=SMD, Multiples=1, Price Type=NET, Pricing 1="25=0.0319, 100=0.0285, 500=0.0252, 2500=0.0219, 7500=0.0204 (EUR)", Stock 1=1100, SuppliedAmount=0, Supplier 1=TME, Supplier Part Number 1=S1M-E3/5AT, Unit=pcs, Weight=0.126
F1: library part Res2, "fuse holder", Colour=black, Contact resistance=5mO, Flammability rating=UL94V-0, Manufacturer=SCHURTER, Manufacturer Part Number=3101.0050, Manufacturer series=FPG5, Maximum current=10A, Operating temperature=-40...85°C, Rated voltage="250V AC", Body material=thermoplastic, Category="Fuses - PCB Fuseholders", ComponentLink1Description=http://static.tme.eu/products_pics/c/7/b/c7be9a841de84195debe9c2bc5e13201/378039.jpg, ComponentLink1URL=http://static.tme.eu/products_pics/c/7/b/c7be9a841de84195debe9c2bc5e13201/378039.jpg, Contact material=copper, Contact plating=tinned, Fuse accessories type="fuse holder", Fuses application="tube fuses", Fuse size=5x20mm, MinAmount=1, Mounting=PCB, Mounting hole diameter=Ø12.5mm, Multiples=1, Price Type=NET, Pricing 1="1=1.3262, 5=1.2056, 20=1.0248, 50=0.9042, 100=0.7837 (EUR)", Stock 1=748, SuppliedAmount=0, Supplier 1=TME, Supplier Part Number 1=3101.0050, Unit=pcs, Weight=5.157
FL1: library part emi_filter, Capacitance Cx=100nF, Capacitance Cy=2.2nF, Inductance of individual winding=2mH, Manufacturer=FILTERCON, Manufacturer Part Number=FM414-2, Operating current max.=2A, Operating voltage="250V AC", Category="THT Suppression Filters", ComponentLink1Description=http://static.tme.eu/products_pics/2/9/f/29f0a38a703704a9c5886b8224f607ef/346186.jpg, ComponentLink1URL=http://static.tme.eu/products_pics/2/9/f/29f0a38a703704a9c5886b8224f607ef/346186.jpg, ComponentLink2Description=http://static.tme.eu/products_pics/f/8/b/f8b7aa3a0d349d9562b424160ad18612/6719.jpg, ComponentLink2URL=http://static.tme.eu/products_pics/f/8/b/f8b7aa3a0d349d9562b424160ad18612/6719.jpg, ComponentLink3Description=http://static.tme.eu/products_pics/3/4/2/3420617ffe855077c7443b070bb0da97/359972.jpg, ComponentLink3URL=http://static.tme.eu/products_pics/3/4/2/3420617ffe855077c7443b070bb0da97/359972.jpg, ComponentLink4Description=http://static.tme.eu/products_pics/8/c/6/8c6609017eb196817ebf7bb4af7e52b0/22859.jpg, ComponentLink4URL=http://static.tme.eu/products_pics/8/c/6/8c6609017eb196817ebf7bb4af7e52b0/22859.jpg, ComponentLink5Description=http://static.tme.eu/products_pics/3/1/9/3198dfd0aef271d22f7bcddd6f12f5cb/6717.jpg, ComponentLink5URL=http://static.tme.eu/products_pics/3/1/9/3198dfd0aef271d22f7bcddd6f12f5cb/6717.jpg, Enclosure material=metal, Filter type=anti-interference, MinAmount=1, Mounting=THT, Multiples=1, Price Type=NET, Pricing 1="1=2.68, 5=2.45, 10=2.02 (EUR)", Pricing 2="1=3.58, 5=3.13, 10=2.68 (EUR)", Pricing 3="1=2.45, 5=2.25, 10=1.89, 50=1.84, 200=1.81 (EUR)", Pricing 4="1=3.13, 5=2.9, 10=2.45 (EUR)", Pricing 5="1=3.58, 5=3.13, 10=2.68 (EUR)", Stock 1=0, Stock 2=25, Stock 3=14, Stock 4=1, Stock 5=0, SuppliedAmount=0, Supplier 1=TME, Supplier 2=TME, Supplier 3=TME, Supplier 4=TME, Supplier 5=TME, Supplier Part Number 1=FM414-2, Supplier Part Number 2=1FM415-0R, Supplier Part Number 3=FM415-0, Supplier Part Number 4=FM411-4, Supplier Part Number 5=1FM411-4R, Unit=pcs, Weight=12.938
J1: library part 2way, ComponentLink1Description=Source, ComponentLink1URL=http://www.edatools.cz/addons, FootprintNote="LP=12mil, MP=40mil, HP=120mil"
J1 J2 J3 J4 J5 J6: library part BNC-PCB-RA, "connector bnc", Manufacturer="TE CONNECTIVITY", Manufacturer Part Number=1-1337543-0, Category="BNC connectors", ComponentLink1Description=http://static.tme.eu/products_pics/6/3/2/63240353f8a8790dbe8f7bd93b014c1a/378606.jpg, ComponentLink1URL=http://static.tme.eu/products_pics/6/3/2/63240353f8a8790dbe8f7bd93b014c1a/378606.jpg, Connector=socket, Connector type=BNC, Connector variant=insulated, Contact plating="gold plated", Electrical mounting=THT, Insulator material=polyester, Mechanical mounting="on PCBs", MinAmount=1, Multiples=1, Price Type=NET, Pricing 1="1=1.22, 25=1.1, 100=0.98, 1000=0.86 (EUR)", Spatial orientation="angled 90°", Stock 1=44, SuppliedAmount=0, Supplier 1=TME, Supplier Part Number 1=1-1337543-0, Unit=pcs, Wave impedance=50O, Weight=13.22
J7: library part USB-B, "USB b device connector", Colour=white, Manufacturer=LUMBERG, Manufacturer Part Number="2411 02", Supplier Part Number 1=2411-02, Category="USB & IEEE1394 connectors", ComponentLink1Description=http://static.tme.eu/products_pics/d/8/1/d81dedeb5f01696a6050c2c1b3ea9f71/397242.jpg, ComponentLink1URL=http://static.tme.eu/products_pics/d/8/1/d81dedeb5f01696a6050c2c1b3ea9f71/397242.jpg, Connector=socket, Connector type="USB B", Electrical mounting=THT, Mechanical mounting="on PCBs", MinAmount=1, Multiples=1, Number of pins=4, Price Type=NET, Pricing 1="1=0.58, 10=0.52, 50=0.46, 100=0.4 (EUR)", Spatial orientation="angled 90°", Stock 1=1211, SuppliedAmount=0, Supplier 1=TME, Unit=pcs, Variant="USB 2.0", Weight=3.4
J8: library part "D Connector 25", "d-sub, 25 pins,  Right Angle", Manufacturer="ADAM TECH", Manufacturer Part Number=DB25-PL-24, Max. contact resistance=20mO, Operating temperature=-55...105°C, Rated current=5A, Category="D-Sub connectors", ComponentLink1Description=http://static.tme.eu/products_pics/a/a/0/aa0b2bedeb24536dd5398409c1e4fa96/378908.jpg, ComponentLink1URL=http://static.tme.eu/products_pics/a/a/0/aa0b2bedeb24536dd5398409c1e4fa96/378908.jpg, Connector=socket, Connector type=D-Sub, Connector variant="7,2mm standard", Electrical mounting=THT, Locking system=screws, MinAmount=1, Multiples=1, Number of pins=25, Price Type=NET, Pricing 1="1=1.2328, 25=1.1047, 100=0.9887, 500=0.8606 (EUR)", Spatial orientation="angled 90°", Stock 1=154, SuppliedAmount=0, Supplier 1=TME, Supplier Part Number 1=DB25-PL-24, Thread=UNC4-40, Unit=pcs, Weight=12.873
K1: library part IDC10, "header 10pin, boxed", Manufacturer=NINIGI, Manufacturer Part Number=ZL231-10PG, Category="IDC connectors", ComponentLink1Description=http://static.tme.eu/products_pics/2/9/e/29e35db67837c6e13659dd28b2765932/375255.jpg, ComponentLink1URL=http://static.tme.eu/products_pics/2/9/e/29e35db67837c6e13659dd28b2765932/375255.jpg, Connector=socket, Connector type=IDC, Contact plating="gold plated", Contacts pitch=2.54mm, Electrical mounting=THT, MinAmount=10, Multiples=10, Number of pins=10, Price Type=NET, Pricing 1="10=0.08292, 50=0.07256, 200=0.06219, 1000=0.05183, 5000=0.04147 (EUR)", Spatial orientation=straight, Stock 1=106380, SuppliedAmount=0, Supplier 1=TME, Supplier Part Number 1=ZL231-10PG, Type of pin configuration=2x5, Unit=pcs, Weight=1.433
P4: library part "Header 3", "IEC pcb AC power socket", Manufacturer=SCHURTER, Manufacturer Part Number=GSP1.8101.1, Operating temperature=-25...70°C, Rated current=10A, Rated voltage="250V AC", Category="AC power connectors", ComponentLink1Description=http://static.tme.eu/products_pics/f/d/c/fdcf8bc89f97dfd93b47315e6a3722d1/329145.jpg, ComponentLink1URL=http://static.tme.eu/products_pics/f/d/c/fdcf8bc89f97dfd93b47315e6a3722d1/329145.jpg, Connector=socket, Connector type="AC supply", Connector variant="C14 (E)", LatestRevisionDate=17-Jul-2002, LatestRevisionNote="Re-released for DXP Platform.", Leads="4.8x0.8mm connectors", Mechanical mounting="on PCBs", MinAmount=1, Mounting hole diameter="30.3 x 22.5mm", Mounting holes pitch=40mm, Multiples=1, Panel thickness="max 3mm", Price Type=NET, Pricing 1="1=0.97, 5=0.92, 10=0.87, 20=0.82, 100=0.72 (EUR)", Publisher="Altium Limited", Standard="IEC 60320", Stock 1=292, SuppliedAmount=0, Supplier 1=TME, Supplier Part Number 1=GSP1.8101.1, Thread=M3, Unit=pcs, Weight=13.947
P5 P6 P9: library part "Header 2X2", "Connector 4 wire pcb", Manufacturer=AMPHENOL, Manufacturer Part Number=MF30-SVE1-04, Max. contact resistance=10mO, Maximum current=5A, Rated voltage=600V, Category="Raster signal connectors 3,00mm", ComponentLink1Description=http://static.tme.eu/products_pics/e/f/f/effbb64ff6c9b38c6fcb05185cd22fc3/31727.jpg, ComponentLink1URL=http://static.tme.eu/products_pics/e/f/f/effbb64ff6c9b38c6fcb05185cd22fc3/31727.jpg, ComponentLink2Description=http://static.tme.eu/products_pics/1/4/c/14c106233a658e6f7b79b3fb4e210ef7/366675.jpg, ComponentLink2URL=http://static.tme.eu/products_pics/1/4/c/14c106233a658e6f7b79b3fb4e210ef7/366675.jpg, Connector=socket, Connector series=MF30, Connector type=wire-board, Connector variant=Glow-Wire, Contact material=copper, Contact plating=tinned, Contacts pitch=3mm, Electrical mounting=SMT, Locking system=latch, Mechanical mounting="on PCBs", MinAmount=5040, Multiples=5040, Number of pins=4, Price Type=NET, Pricing 1="5040=0.32 (EUR)", Pricing 2="1=0.758, 10=0.593, 50=0.427, 200=0.377, 1000=0.332 (EUR)", Spatial orientation=vertical, Stock 1=0, Stock 2=3787, SuppliedAmount=0, Supplier 1=TME, Supplier 2=TME, Supplier Part Number 1=MF30-SVE1-04, Supplier Part Number 2=MX-43045-0412, Type of pin configuration=2x2, Unit=pcs, Weight=1.6
Q1: library part IRLML2502, "N CHANNEL MOSFET"
R1 R25 R33 R36 R39 R40 R41 R42: library part Res1, "Resistor", Case - inch=0805, Case - mm=2012, Kind of resistor=precise, Manufacturer=VIKING, Manufacturer Part Number=AR05BTCW1001, Manufacturer series=AR, Max. operating voltage=150V, Max. overload voltage=300V, Operating temperature=-55...155°C, Power=0.125W, Resistance=1kO, Resistor type="thin film", Supplier Part Number 1=AR0805-1K-0.1%, Temperature coefficient=25ppm/°C, Tolerance=±0.1%, Category="0805 SMD Precision Resistors", ComponentLink1Description=http://static.tme.eu/products_pics/6/6/c/66cc5cd64257edd80ca8e9fd2040972d/56038.jpg, ComponentLink1URL=http://static.tme.eu/products_pics/6/6/c/66cc5cd64257edd80ca8e9fd2040972d/56038.jpg, LatestRevisionDate=17-Jul-2002, LatestRevisionNote="Re-released for DXP Platform.", MinAmount=10, Mounting=SMD, Multiples=10, PackageDescription="Axial Device, Thru-Hole; 2 Leads; 0.3 in Pin Spacing", PackageReference=AXIAL-0.3, Price Type=NET, Pricing 1="10=0.11211, 100=0.05707, 1000=0.03771, 5000=0.03176 (EUR)", Pricing 2="10=0.11119, 100=0.05661, 1000=0.0374, 5000=0.0315 (EUR)", Published=8-Jun-2000, Publisher="Altium Limited", Stock 1=0, Stock 2=750, SuppliedAmount=0, Supplier 1=TME, Supplier 2=TME, Supplier Part Number 2=AR0805-1K13-0.1%, Unit=pcs, Weight=0.034
R2 R3 R4 R5 R7 R8 R9 R10 R11 R13 R15 R16 R17: library part Res1, "Resistor", Case - inch=0805, Case - mm=2012, Manufacturer=YAGEO, Manufacturer Part Number=RC0805JR-0710KL, Max. operating voltage=150V, Max. overload voltage=300V, Operating temperature=-55...155°C, Power=0.125W, Resistance=10kO, Resistor type="thick film", Supplier Part Number 1=RC0805JR-0710K, Tolerance=±5%, Category="0805 SMD Resistors", ComponentLink1Description=http://static.tme.eu/products_pics/6/6/c/66cc5cd64257edd80ca8e9fd2040972d/56038.jpg, ComponentLink1URL=http://static.tme.eu/products_pics/6/6/c/66cc5cd64257edd80ca8e9fd2040972d/56038.jpg, LatestRevisionDate=17-Jul-2002, LatestRevisionNote="Re-released for DXP Platform.", MinAmount=100, Mounting=SMD, Multiples=100, PackageDescription="Axial Device, Thru-Hole; 2 Leads; 0.3 in Pin Spacing", PackageReference=AXIAL-0.3, Price Type=NET, Pricing 1="100=0.006, 1000=0.0036, 5000=0.00118, 15000=0.00108, 50000=0.00094 (EUR)", Published=8-Jun-2000, Publisher="Altium Limited", Stock 1=121900, SuppliedAmount=0, Supplier 1=TME, Unit=pcs, Weight=0.028
R6 R12 R43 R44 R45 R46 R47 R48: library part Res1, "Resistor", Case - inch=0805, Case - mm=2012, Manufacturer="ROYAL OHM", Manufacturer Part Number=0805S8F220JT5E, Max. operating voltage=150V, Max. overload voltage=300V, Operating temperature=-55...125°C, Power=0.125W, Resistance=22O, Resistor type="thick film", Supplier Part Number 1=SMD0805-22R-1%, Temperature coefficient=200ppm/°C, Tolerance=±1%, Category="0805 SMD Resistors", ComponentLink1Description=http://static.tme.eu/products_pics/a/3/4/a34f7a182e69d69fdfdb65c44b99ca64/60560.jpg, ComponentLink1URL=http://static.tme.eu/products_pics/a/3/4/a34f7a182e69d69fdfdb65c44b99ca64/60560.jpg, MinAmount=100, Mounting=SMD, Multiples=100, Price Type=NET, Pricing 1="100=0.00846, 1000=0.00329, 5000=0.00113, 15000=0.00108, 50000=0.00103 (EUR)", Stock 1=22000, SuppliedAmount=0, Supplier 1=TME, Unit=pcs, Weight=0.031
R14: "Resistor", Case - inch=0805, Case - mm=2012, Manufacturer=YAGEO, Manufacturer Part Number=RC0805JR-0710KL, Max. operating voltage=150V, Max. overload voltage=300V, Operating temperature=-55...155°C, Power=0.125W, Resistance=10kO, Resistor type="thick film", Supplier Part Number 1=RC0805JR-0710K, Tolerance=±5%, Category="0805 SMD Resistors", ComponentLink1Description=http://static.tme.eu/products_pics/6/6/c/66cc5cd64257edd80ca8e9fd2040972d/56038.jpg, ComponentLink1URL=http://static.tme.eu/products_pics/6/6/c/66cc5cd64257edd80ca8e9fd2040972d/56038.jpg, LatestRevisionDate=17-Jul-2002, LatestRevisionNote="Re-released for DXP Platform.", MinAmount=100, Mounting=SMD, Multiples=100, PackageDescription="Axial Device, Thru-Hole; 2 Leads; 0.3 in Pin Spacing", PackageReference=AXIAL-0.3, Price Type=NET, Pricing 1="100=0.006, 1000=0.0036, 5000=0.00118, 15000=0.00108, 50000=0.00094 (EUR)", Published=8-Jun-2000, Publisher="Altium Limited", Stock 1=121900, SuppliedAmount=0, Supplier 1=TME, Unit=pcs, Weight=0.028
R18 R20 R21 R22 R23 R24: library part Res1, "Resistor", Case - inch=0805, Case - mm=2012, Kind of resistor=precise, Manufacturer=VIKING, Manufacturer Part Number=AR05BTCW2702, Manufacturer series=AR, Max. operating voltage=150V, Max. overload voltage=300V, Operating temperature=-55...155°C, Power=0.125W, Resistance=27kO, Resistor type="thin film", Supplier Part Number 1=AR0805-27K-0.1%, Temperature coefficient=25ppm/°C, Tolerance=±0.1%, Category="0805 SMD Precision Resistors", ComponentLink1Description=http://static.tme.eu/products_pics/6/6/c/66cc5cd64257edd80ca8e9fd2040972d/56038.jpg, ComponentLink1URL=http://static.tme.eu/products_pics/6/6/c/66cc5cd64257edd80ca8e9fd2040972d/56038.jpg, MinAmount=10, Mounting=SMD, Multiples=10, Price Type=NET, Pricing 1="10=0.11146, 100=0.05674, 1000=0.0375, 5000=0.03158 (EUR)", Stock 1=270, SuppliedAmount=0, Supplier 1=TME, Unit=pcs, Weight=0.084
R19 R38: library part Res1, "Resistor", Case - inch=0805, Case - mm=2012, Manufacturer="ROYAL OHM", Manufacturer Part Number=0805S8F1002T5E, Max. operating voltage=150V, Max. overload voltage=300V, Operating temperature=-55...125°C, Power=0.125W, Resistance=10kO, Resistor type="thick film", Supplier Part Number 1=SMD0805-10K-1%, Temperature coefficient=100ppm/°C, Tolerance=±1%, Category="0805 SMD Resistors", ComponentLink1Description=http://static.tme.eu/products_pics/a/3/4/a34f7a182e69d69fdfdb65c44b99ca64/60560.jpg, ComponentLink1URL=http://static.tme.eu/products_pics/a/3/4/a34f7a182e69d69fdfdb65c44b99ca64/60560.jpg, MinAmount=100, Mounting=SMD, Multiples=100, Price Type=NET, Pricing 1="100=0.00735, 1000=0.00287, 5000=0.00105, 15000=0.00095, 50000=0.00093 (EUR)", Stock 1=967000, SuppliedAmount=0, Supplier 1=TME, Unit=pcs, Weight=0.031
R26 R27 R29 R30 R31 R32 R34 R35: library part Res1, "Resistor", Manufacturer="ROYAL OHM", Manufacturer Part Number=KNP05SJ020JA10, Power=5W, Resistance=2O, Resistor features="body resistant to high temperature", Resistor type=wire-wound, Supplier Part Number 1=KNP05WS-2R, Temperature coefficient=400ppm/°C, Tolerance=±5%, Body dimensions="Ø6.5 x 17.5mm", Category="5W Wirewound Resistors", ComponentLink1Description=http://static.tme.eu/products_pics/9/e/4/9e4c4267803c7e60e916f65a2d0e49cc/28604.jpg, ComponentLink1URL=http://static.tme.eu/products_pics/9/e/4/9e4c4267803c7e60e916f65a2d0e49cc/28604.jpg, Leads=axial, Leads dimensions="Ø0.75 x 28mm", MinAmount=5, Mounting=THT, Multiples=1, Price Type=NET, Pricing 1="5=0.14201, 25=0.09442, 100=0.07533, 500=0.05981, 2000=0.05472 (EUR)", Stock 1=894, SuppliedAmount=0, Supplier 1=TME, Unit=pcs, Weight=1.806
R28: library part Res1, "Resistor", Resistance=1
R37: library part RPot, "Potentiometer", Manufacturer="SR PASSIVES", Manufacturer Part Number=T910X-200R, Operating temperature=-55...125°C, Power=500mW, Resistance=200O, Similar models from other manufacturers=3296X, Temperature coefficient=100ppm/°C, Tolerance=±10%, Body dimensions="10 x 9.5 x 4.8mm", Category="3/8 inch Multiturn THT Trimmers", Characteristics=linear, ComponentLink1Description=http://static.tme.eu/products_pics/7/b/2/7b2b1e29184f9b1b0107dd10f44132ec/347694.jpg, ComponentLink1URL=http://static.tme.eu/products_pics/7/b/2/7b2b1e29184f9b1b0107dd10f44132ec/347694.jpg, Control=horizontal, Mechanical durability=200cycles, MinAmount=5, Mounting=THT, Multiples=1, Number of mechanical turns=28, Potentiometer kind=multiturn, Potentiometer standard="3/8\"", Potentiometer type=mounting, Price Type=NET, Pricing 1="5=0.2065, 25=0.1601, 100=0.1369, 500=0.1044, 2000=0.0905 (EUR)", Stock 1=406, SuppliedAmount=0, Supplier 1=TME, Supplier Part Number 1=T910X-200R, Terminal pitch=2.5mm, Track material=cermet, Unit=pcs, Weight=0.733
S2: library part t22205b, "Switch DPDT 230-115V", Supplier Part Number 1=AE-T22205B, Supplier 1=TME